# EAGLE board 2- Display Bala (EAGLE 9.7.0)

Size 189.9 x 56.04 mm. Coordinates in mm from the lower left corner, seen from the top.
Outline: 0,0 189.9,0 189.9,56.04 0,56.04 0,0
Copper layers (1*16): Top 0.035mm / dielectric 1.5mm / Bottom 0.035mm
Design rules "default": minimum track width 6mil, minimum drill 0.35mm, track to track 6mil, track to pad 6mil, pad to pad 6mil, via to via 6mil, smd to smd 6mil, copper to edge 40mil, drill to drill 6mil, minimum pad ring 10mil, minimum via ring 8mil, stop-mask expansion 4mil, vias tented up to drill 0mil, thermal gap 10mil

## Footprints (pad centres in the part's own frame; a part is rotated, then mirrored left to right if it is on the bottom)
7SEG-13 = drill 0.813 long: 1 -5.08,-7.62; 2 -2.54,-7.62; 3 0,-7.62; 4 2.54,-7.62; 5 5.08,-7.62; 6 5.08,7.62; 7 2.54,7.62; 8 0,7.62; 9 -2.54,7.62; 10 -5.08,7.62
BATTERY-GENERIC = drill 1.118 pad 3.15 octagon: + 2.54,0; - -2.54,0
RESAD1016W63L850D250B = drill 0.83 pad 1.43: 1 -5.08,0; 2 5.08,0
78B04ST = drill 0.8: 1 -3.81,-3.81; 2 -1.27,-3.81; 3 1.27,-3.81; 4 3.81,-3.81; 5 3.81,3.81; 6 1.27,3.81; 7 -1.27,3.81; 8 -3.81,3.81
DIP762W53P254L1969H508Q14B = drill 0.743 pad 1.343: 1 -3.81,7.62; 2 -3.81,5.08; 3 -3.81,2.54; 4 -3.81,0; 5 -3.81,-2.54; 6 -3.81,-5.08; 7 -3.81,-7.62; 8 3.81,-7.62; 9 3.81,-5.08; 10 3.81,-2.54; 11 3.81,0; 12 3.81,2.54; 13 3.81,5.08; 14 3.81,7.62

## Placement (x,y rotation side)
DIGIT5  7SEG-CA  [7SEG-13]  148.01,26.75 0 top
P1  BATTERYGENERIC  [BATTERY-GENERIC]  8.26,19.88 180 top
R2  4700  [RESAD1016W63L850D250B]  36.25,47.07 90 top
R3  4700  [RESAD1016W63L850D250B]  43.87,47.07 90 top
R5  390  [RESAD1016W63L850D250B]  142.93,8.97 90 top
R6  390  [RESAD1016W63L850D250B]  183.57,8.97 90 top
R7  390  [RESAD1016W63L850D250B]  112.45,29.29 90 top
R8  390  [RESAD1016W63L850D250B]  130.23,29.29 90 top
R9  390  [RESAD1016W63L850D250B]  99.75,29.29 90 top
SW2  SPST-478B04ST  [78B04ST]  40.06,28.02 0 top
U5  74HC04_PDIP  [DIP762W53P254L1969H508Q14B]  56.57,28.02 90 top
U6  74HC08_PDIP  [DIP762W53P254L1969H508Q14B]  76.89,28.02 90 top

## Library data of the parts
DIGIT5 = Tinkercad; CATEGORY: Opto-Electronic; SUB-CATEGORY: Display; TYPE: 7-Segment
P1 R2 R3 R5-R9 SW2 U5 U6 = Tinkercad

## Nets
DIGIT5_A: DIGIT5.6 DIGIT5.7 R8.2
DIGIT5_D: DIGIT5.2 R7.1
DIGIT5_E: DIGIT5.1 R5.2
DIGIT5_F: DIGIT5.9 R6.2
DIGIT5_G: DIGIT5.4 DIGIT5.10 R9.2
P1+: DIGIT5.8 P1.+ R2.2 R3.2 U5.14 U6.14
P1-: P1.- R5.1 R6.1 SW2.1 SW2.4 U5.7 U6.7
U5_1A: R2.1 R7.2 SW2.8 U5.1
U5_1Y: R8.1 U5.2 U6.1
U6_1B: R3.1 SW2.5 U6.2
U6_1Y: R9.1 U6.3

## Tracks (layer width: path | path; a pad name or v marks a point on that pad's centre or on a via)
DIGIT5_A  (2 unrouted)
DIGIT5_D  (1 unrouted)
DIGIT5_E  (1 unrouted)
DIGIT5_F  (1 unrouted)
DIGIT5_G  (2 unrouted)
P1+  (5 unrouted)
P1-  (6 unrouted)
U5_1A  (3 unrouted)
U5_1Y  (2 unrouted)
U6_1B  (2 unrouted)
U6_1Y  (1 unrouted)